# Altium PCB USB_UART_V1.4 úĘ1úę.PcbDoc
Units mm, origin at the board's own origin, x right, y up, seen from the top; angles counter-clockwise.
Board outline 59.31 x 18 mm, 2 copper layers (Top Layer, Bottom Layer); 22 components, 24 nets, 98 pads, 72 vias.
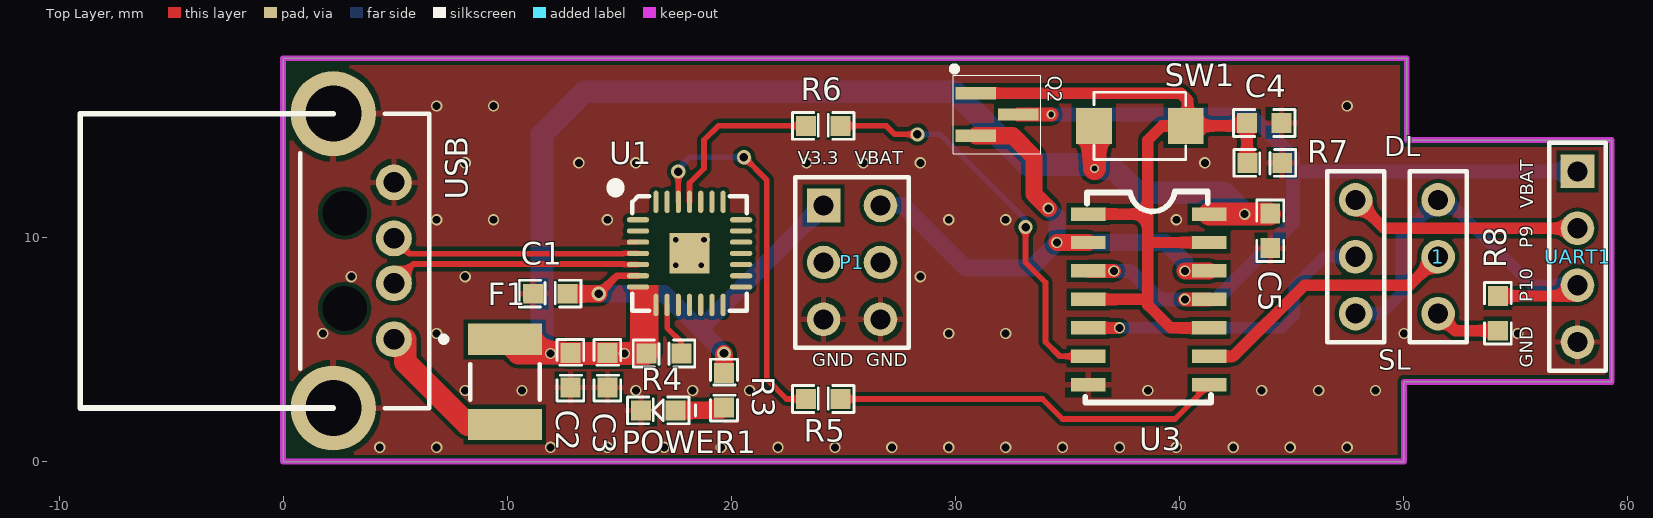
[diagram p0: Top Layer view]
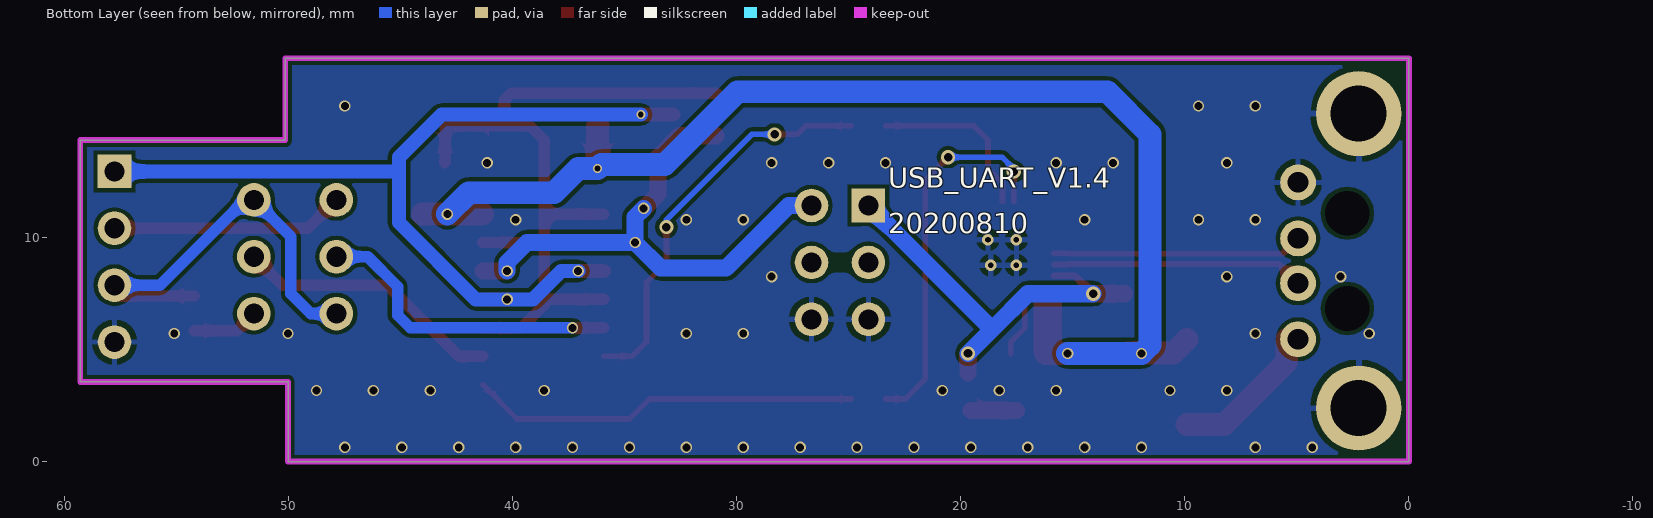
[diagram p1: Bottom Layer view, seen from below]

## Layer stack, top to bottom
Top Layer: signal copper 0.0356
Dielectric: dielectric 0.32, FR-4, Dk 4.8
Bottom Layer: signal copper 0.0356

## Board outline
0,0 0,18 50.165,18 50.165,14.351 59.309,14.351 59.309,3.556 50.038,3.556 50.038,0

## Design rules (kind name [scope] priority, off if disabled: settings)
Clearance [All] p1: gap=0.178
ComponentClearance [All] p1: gap=0.254 collisioncheckmode=3 verticalgap=0.254
DiffPairsRouting [All] p1: maxlimit=0.254 minlimit=0.203 mostfreqgap=0.254 toplayer_prefgap=0.203 bottomlayer_prefgap=0.203 maxuncoupledlength=12.7
HoleSize [All] p1: absolutevalues=TRUE maxlimit=25.4 minlimit=0.025 maxpercent=80.000 minpercent=20.000
PolygonConnect [All] p1: connectstyle=Relief reliefconductorwidth=0.254 reliefentries=4 polygonreliefangle="90 Angle"
RoutingCorners [All] p1: cornerstyle=45-Degree minsetback=2.54 maxsetback=25.4
RoutingVias [All] p1: holewidth=0.711 width=1.27 viastyle="Through Hole" minholewidth=0.254 minwidth=0.508 maxholewidth=0.711 maxwidth=1.27
SolderMaskExpansion [All] p1: expansion=0.102
TestPointUsage FabricationTestPointUsage [All] p1: valid=0 allowmultiple=FALSE
Testpoint FabricationTestpoint [All] p1: side=3 testpointundercomponent=TRUE minsize=1.016 maxsize=2.54 preferedsize=1.524 minholesize=0 maxholesize=1.016 preferedholesize=0.813 testpointgrid=0.025 style=297 order=0123456789
Width [All] p1: maxlimit=2.54 minlimit=0.178 preferedwidth=0.254
15 further rules are at their usual default settings.

## Classes and differential pairs
component class USB-UART: C1 C2 C3 P1 POWER1 R3 R4 U1 UART1 USB "USB 1"
differential pair NewDifferentialPair1: +D+ -D-

## Components (designator, comment, footprint, x,y, rotation, side; value= is the part's Value field where it differs from the comment)
1 "Comment" HDR1X3 51.562,11.684 r270 top
C1 "0.1uF" C0603 12.7,7.493 r180 top
C2 "10uF" C0603 12.827,3.302 r90 top
C3 "0.1uF" C0603 14.478,3.302 r90 top
C4 "1uf" R0603 44.577,15.113 r180 top (schematic designator R2)
C5 "10uf" R0603 44.069,9.525 r90 top (schematic designator R2)
F1 "SMD110" 1812 9.906,3.556 r270 top
P1 "Header 3X2" HDR2X3 24.13,11.43 r270 top
POWER1 "LED0" LED0603 18.161,2.921 r180 top
Q2 "PMOS-SI2301" "NMOS 2300" 30.861,16.383 r270 top (schematic designator Q4)
R3 "4.7K" C0603 19.685,2.413 r90 top
R4 "4.7k" C0603 16.23,4.826 r0 top
R5 "0" C0603 24.892,2.794 r180 top (schematic designator R3)
R6 "0" C0603 24.892,14.986 r180 top (schematic designator R3)
R7 "10k" C0603 43.053,13.335 r0 top (schematic designator R3)
R8 "4.7K" R0603 54.229,5.842 r90 top (schematic designator R2)
SW1 "Comment" "SW  3*4*2" 36.195,14.986 r0 top
U1 "cp2102" CP2102 18.147,9.295 r0 top
U3 "Comment" SOIC-14 35.941,11.049 r270 top
UART1 "CON4" HDR1X4 57.785,12.954 r270 top
USB "MHDR1X6" "USB 公口" 4.953,5.461 r0 top (schematic designator "USB 1")
? "Comment" HDR1X3 47.879,11.684 r270 top

## Footprints (in the part's own frame and the unit in brackets; to place one, negate y for a bottom-side part, rotate by r counter-clockwise, add the part's x,y. Pads: shape width x height; smd on the part's side, far side on the other; paste and mask are expansions set on the pad)
1812 [mm] "Chip Capacitor, Body 4.5x3.2mm, IPC High Density"
  rect 1.4x3.3 smd: 1(-1.9,0) 2(1.9,0)
  silkscreen extent -0.8,-1.55 0.8,1.55
C0603 [mil]
  rect 35x35 smd: 1(0,0) 2(61.02,0)
  silkscreen extent -24,-24 85,24
CP2102 [mm]
  oval 1x0.23 smd: 1(-2.3,1.5) 2(-2.3,1) 3(-2.3,0.5) 4(-2.3,0) 5(-2.3,-0.5) 6(-2.3,-1) 7(-2.3,-1.5) 15(2.3,-1.5) 16(2.3,-1) 17(2.3,-0.5) 18(2.3,0) 19(2.3,0.5) 20(2.3,1) 21(2.3,1.5)
  oval 0.23x1 smd: 8(-1.5,-2.3) 9(-1,-2.3) 10(-0.5,-2.3) 11(0,-2.3) 12(0.5,-2.3) 13(1,-2.3) 14(1.5,-2.3) 22(1.5,2.3) 23(1,2.3) 24(0.5,2.3) 25(0,2.3) 26(-0.5,2.3) 27(-1,2.3) 28(-1.5,2.3)
  rect 1.8x1.8 smd: 29(0,0)
  silkscreen extent -3.3,-2.56 2.55,2.96
HDR1X3 [mm]
  round 1.5 hole 0.9: 1(0,0) 2(2.54,0) 3(5.08,0)
  silkscreen extent -1.27,-1.27 6.35,1.27
HDR1X4 [mm]
  rect 1.5x1.5 hole 0.9: 1(0,0)
  round 1.5 hole 0.9: 2(2.54,0) 3(5.08,0) 4(7.62,0)
  silkscreen extent -1.27,-1.27 8.89,1.27
HDR2X3 [mm] "Connector; Header; 3x2 Position"
  rect 1.5x1.5 hole 0.9: 1(0,0)
  round 1.5 hole 0.9: 2(0,2.54) 3(2.54,0) 4(2.54,2.54) 5(5.08,0) 6(5.08,2.54)
  silkscreen extent -1.27,-1.27 6.35,3.81
LED0603 [mil]
  rect 35x35 smd: 1(25,25) 2(86.02,25)
  silkscreen extent -10,1 110,49
"NMOS 2300" [mm]
  rect 0.55x1.8 smd: 1(-0.061,0.066) 2(1.839,0.066) 3(0.889,1.966)
  silkscreen extent -1.27,-1.01 2.64,2.97
R0603 [mil]
  rect 35x35 smd: 1(0,0) 2(61.02,0)
  silkscreen extent -24,-24 85,24
SOIC-14 [mm]
  rect 0.6x1.55 smd: 1(0,0) 2(1.27,0) 3(2.54,0) 4(3.81,0) 5(5.08,0) 6(6.35,0) 7(7.62,0) 8(7.62,5.4) 9(6.35,5.4) 10(5.08,5.4) 11(3.81,5.4) 12(2.54,5.4) 13(1.27,5.4) 14(0,5.4)
  silkscreen extent -1.01,-0.13 8.41,5.49
"SW  3*4*2" [mm]
  rect 1.6x1.6 smd: 1(0,0) 2(4.1,0)
  silkscreen extent 0,-1.5 4.1,1.5
"USB 公口" [mm]
  round 1 hole 2 unplated: 0(-2.2,1.375) 0(-2.2,5.625)
  round 1.6 hole 0.92: 1(0,0) 2(0,2.5) 3(0,4.5) 4(0,7)
  round 3.8 hole 2.5: 5(-2.71,10.07) 6(-2.71,-3.07)
  silkscreen extent -14,-3.07 2.35,10.07

## Part data
C1 C2 C3: library part Cap, "Capacitor"
C4 C5 R8: library part 电阻贴片
F1: library part FUSE2, "Fuse"
P1: "Header, 3-Pin, Dual row"
POWER1: "Typical INFRARED GaAs LED"
Q2: library part NMOS-2, "N-Channel Power MOSFET"
R3 R4 R5 R6 R7: library part Res2, "Resistor"
USB: "Header, 6-Pin"

## Via types
v1: diameter 0.508, hole 0.356, Top Layer to Bottom Layer, tented both sides, 60 vias
v2: diameter 0.635, hole 0.381, Top Layer to Bottom Layer, tented both sides, 6 vias
v3: diameter 0.508, hole 0.254, Top Layer to Bottom Layer, tented both sides, 4 vias
v4: diameter 0.406, hole 0.254, Top Layer to Bottom Layer, tented both sides, 2 vias

## Nets (pads, with @x,y where several pads share a name; then routed paths per layer and width w, separated by ;. In a path a pad name is that pad's centre, name@x,y a point inside that pad or via, vN(x,y) a via of type N, cw(c..) or ccw(c..) an arc to the next point about the centre after c; other vN are vias at no path point)
5V: C2.2 C3.2 C5.2 F1.1 R4.1 SW1.1 U1.7 U1.8 U3.14 | length 58.9
  Top Layer w1.016: F1.1 10.51,4.852 12.547,4.852 12.573,4.826 v1(15.24,4.826) R4.1 ; SW1.1 36.22,14.961 v4(36.22,13.081) ; U3.14 v1(42.926,11.049) C5.2@44.043,11.049
  Bottom Layer w1.016: v1(15.24,4.826) v1(11.938,4.826) 11.557,5.207 11.557,14.605 13.462,16.51 29.972,16.51 33.223,13.259 36.043,13.259 v4(36.22,13.081) 37.084,13.081 38.163,12.002 41.974,12.002 v1(42.926,11.049)
5V_1: F1.2 USB.1 | length 6.6
  Top Layer w1.016: USB.1@5.461,5.446 5.461,4.445 8.25,1.656 F1.2
D+: U1.4 USB.3 | length 11.2
  Top Layer w0.254: USB.3 5.64,9.274 15.199,9.274 15.22,9.295 U1.4
D-: U1.5 USB.2 | length 11.3
  Top Layer w0.254: USB.2 5.808,8.816 15.199,8.816 15.22,8.795 U1.5
GND: C1.2 C2.1 C3.1 C4.1 C5.1 P1.5 P1.6 POWER1.2 R7.2 U1.3 U1.29 U3.7 UART1.4 USB.4 USB.5 USB.6
  other v1: 4.318,0.635 6.858,0.635 11.938,0.635 14.478,0.635 17.018,0.635 19.558,0.635 22.098,0.635 24.638,0.635 27.178,0.635 29.718,0.635 32.258,0.635 34.798,0.635 37.338,0.635 39.878,0.635 42.418,0.635 44.958,0.635 47.498,0.635 8.128,3.175 10.668,3.175 15.748,3.175 18.288,3.175 20.828,3.175 38.608,3.175 43.688,3.175 46.228,3.175 48.768,3.175 1.778,5.715 6.858,5.715 29.718,5.715 32.258,5.715 50.038,5.715 55.118,5.715 3.048,8.255 8.128,8.255 28.448,8.255 6.858,10.795 9.398,10.795 14.478,10.795 29.718,10.795 32.258,10.795 39.878,10.795 8.128,13.335 13.208,13.335 15.748,13.335 23.368,13.335 25.908,13.335 28.448,13.335 41.148,13.335 6.858,15.875 9.398,15.875 47.498,15.875
  other v3: 17.526,8.763 18.669,8.763 17.526,9.906 18.796,9.906
GND_EVB: 
NET: C4.2 Q2.1 R7.1 SW1.2 U3.1 U3.4 U3.10 U3.13 | length 35.4
  Top Layer w0.508: Q2.1 40.071,16.444 40.386,16.129 40.386,15.077 SW1.2 ; U3.4 38.354,7.239 ; U3.1 38.608,11.049 ; 38.735,9.779 U3.13 ; U3.10 39.624,5.969 38.608,6.985 38.608,14.351 39.243,14.986 SW1.2 ; C4.2 C4.2@42.9,14.986 ; R7.1 43.027,13.361 43.027,14.859 C4.2@42.9,14.986 ; SW1.2 C4.2@42.9,14.986
NET1: 1.3 R8.1 | length 3
  Top Layer w0.508: 1.3 52.324,5.842 R8.1
NetBUSY1_1: 
NetPOWER1_1: POWER1.1 R3.1 | length 2
  Top Layer w0.762: POWER1.1 R3.1@19.558,2.286
NetR2_2: 
P9: R6.1 U3.6 | length 18
  Top Layer w0.254: R6.1 26.924,14.986 27.305,14.605 v2(28.321,14.605) ; v2(33.147,10.466) 33.147,8.89 34.036,8.001 34.036,5.334 34.671,4.699 U3.6
  Bottom Layer w0.254: v2(28.321,14.605) 29.337,14.605 33.147,10.795 v2(33.147,10.466)
P9_EVB: ?.2 U3.5 | length 14
  Top Layer w0.508: U3.5 v1(37.338,5.969)
  Bottom Layer w0.508: v1(37.338,5.969) 44.577,5.969 45.148,6.54 45.148,7.81 46.482,9.144 ?.2
P9EVB1: ?.1 UART1.2 | length 10.4
  Top Layer w0.508: ?.1 49.149,10.414 UART1.2
P10: R5.1 U3.8 | length 17.4
  Top Layer w0.254: R5.1 33.274,2.794 33.909,2.794 34.798,1.905 39.817,1.905 U3.8
P10_EVB: 1.2 U3.9 | length 12.1
  Top Layer w0.508: U3.9 42.418,4.699 45.593,7.874 50.292,7.874 1.2
P10EVB1: 1.1 ?.3 R8.2 UART1.3 | length 18.8
  Top Layer w0.508: R8.2 57.303,7.392 UART1.3
  Bottom Layer w0.508: ?.3 49.022,6.604 49.911,7.493 49.911,10.033 1.1 51.943,11.684 55.753,7.874 UART1.3
RST: R4.2 U1.9 | length 2.4
  Top Layer w0.254: U1.9 17.147,5.967 17.78,5.334 R4.2
RXD: R6.2 U1.25 | length 7.8
  Top Layer w0.254: U1.25 18.147,12.432 18.796,13.081 18.796,14.351 19.431,14.986 R6.2
TXD: R5.2 U1.26 | length 17.1
  Top Layer w0.254: U1.26 v2(17.647,12.948) v2@17.653,12.954 ; v2(20.574,13.589) 21.59,12.573 21.59,3.683 22.479,2.794 R5.2
  Bottom Layer w0.254: v2(17.647,12.948) 17.647,13.075 18.161,13.589 v2(20.574,13.589)
V1.8: 
V3.3: C1.1 P1.1 R3.2 U1.6 | length 18.9
  Top Layer w0.305: v2(14.097,7.493) 14.899,8.295 U1.6
  Top Layer w0.762: C1.1 v2(14.097,7.493) ; R3.2 v2(19.685,4.826)
  Bottom Layer w0.762: v2(14.097,7.493) 17.018,7.493 18.542,5.969 ; v2(19.685,4.826) 18.542,5.969 ; P1.1 18.669,5.969 18.542,5.969
V3.3_EVB: Q2.3 U3.3 U3.11 UART1.1 | length 40.9
  Top Layer w0.635: Q2.3 v4(34.29,15.494) ; U3.3 v1(37.084,8.509) ; v1(40.259,7.239) U3.11
  Bottom Layer w0.635: v4(34.29,15.494) 43.18,15.494 45.085,13.589 45.085,12.827 ; v1(37.084,8.509) 37.846,8.509 39.116,7.239 v1(40.259,7.239) 41.656,7.239 45.085,10.668 45.085,12.827 ; UART1.1 45.212,12.954 45.085,12.827
VBAT: P1.2 Q2.2 U3.2 U3.12 | length 25.7
  Top Layer w0.762: Q2.2 32.573,14.544 33.528,13.589 33.528,11.938 v1(34.163,11.303) ; v1(34.544,9.779) U3.2 ; v1(40.259,8.509) U3.12
  Bottom Layer w0.762: P1.2 27.686,11.43 30.48,8.636 33.401,8.636 v1(34.544,9.779) ; v1(34.163,11.303) 34.544,10.922 v1(34.544,9.779) ; v1(40.259,8.509) 40.259,8.89 39.37,9.779 v1(34.544,9.779)
pads on no net: P1.3 P1.4 U1.1 U1.2 U1.10 U1.11 U1.12 U1.13 U1.14 U1.15 U1.16 U1.17 U1.18 U1.19 U1.20 U1.21 U1.22 U1.23 U1.24 U1.27 U1.28 USB.0

## Polygon pours and split planes (outlines as drawn)
GND on Top Layer "Top Layer-No Net" (solid, remove dead copper, pour order 4): -2.794,19.558 -2.032,18.796 59.944,18.796 59.944,0.254 60.452,-0.254 59.817,-0.889 -1.397,-0.889
GND on Bottom Layer "Top Layer-No Net" (solid, remove dead copper, pour order 6): 0.762,19.05 59.69,19.05 60.833,17.907 60.96,17.78 60.96,-4.826 2.032,-4.826 -1.905,-0.889 -1.651,-0.635 -1.651,18.034

## Keep-outs
Keep-Out Layer:
  the board outline again, w0.254

## Other copper
Top Layer:
  rectangle net 5V: 15.494,4.826 16.764,7.874
  pour cut-out: 16.637,11.174 19.939,11.174 19.812,11.047 19.812,7.491 16.51,7.491 16.31,10.993

## Silkscreen, mask and mechanical layers (free items; w line width, h text height)
Top Overlay:
  text "DL" at 49.149,13.335 h1.52
  text "V3.3" at 22.987,13.081 h1.02
  text "VBAT" at 25.527,13.081 h1.02
  text "VBAT" at 56.007,11.303 h1.02 r90
  text "P9" at 55.996,9.525 h1.02 r90
  text "P10" at 55.996,7.112 h1.02 r90
  text "GND" at 55.996,4.191 h1.02 r90
  text "GND" at 23.622,4.064 h1.02
  text "GND" at 26.035,4.064 h1.02
  text "SL" at 48.895,3.81 h1.52
Bottom Overlay:
  text "USB_UART_V1.4" at 23.241,11.938 h1.52
  text "20200810" at 23.241,9.906 h1.52